# Allegro board PMOD2BNC.brd
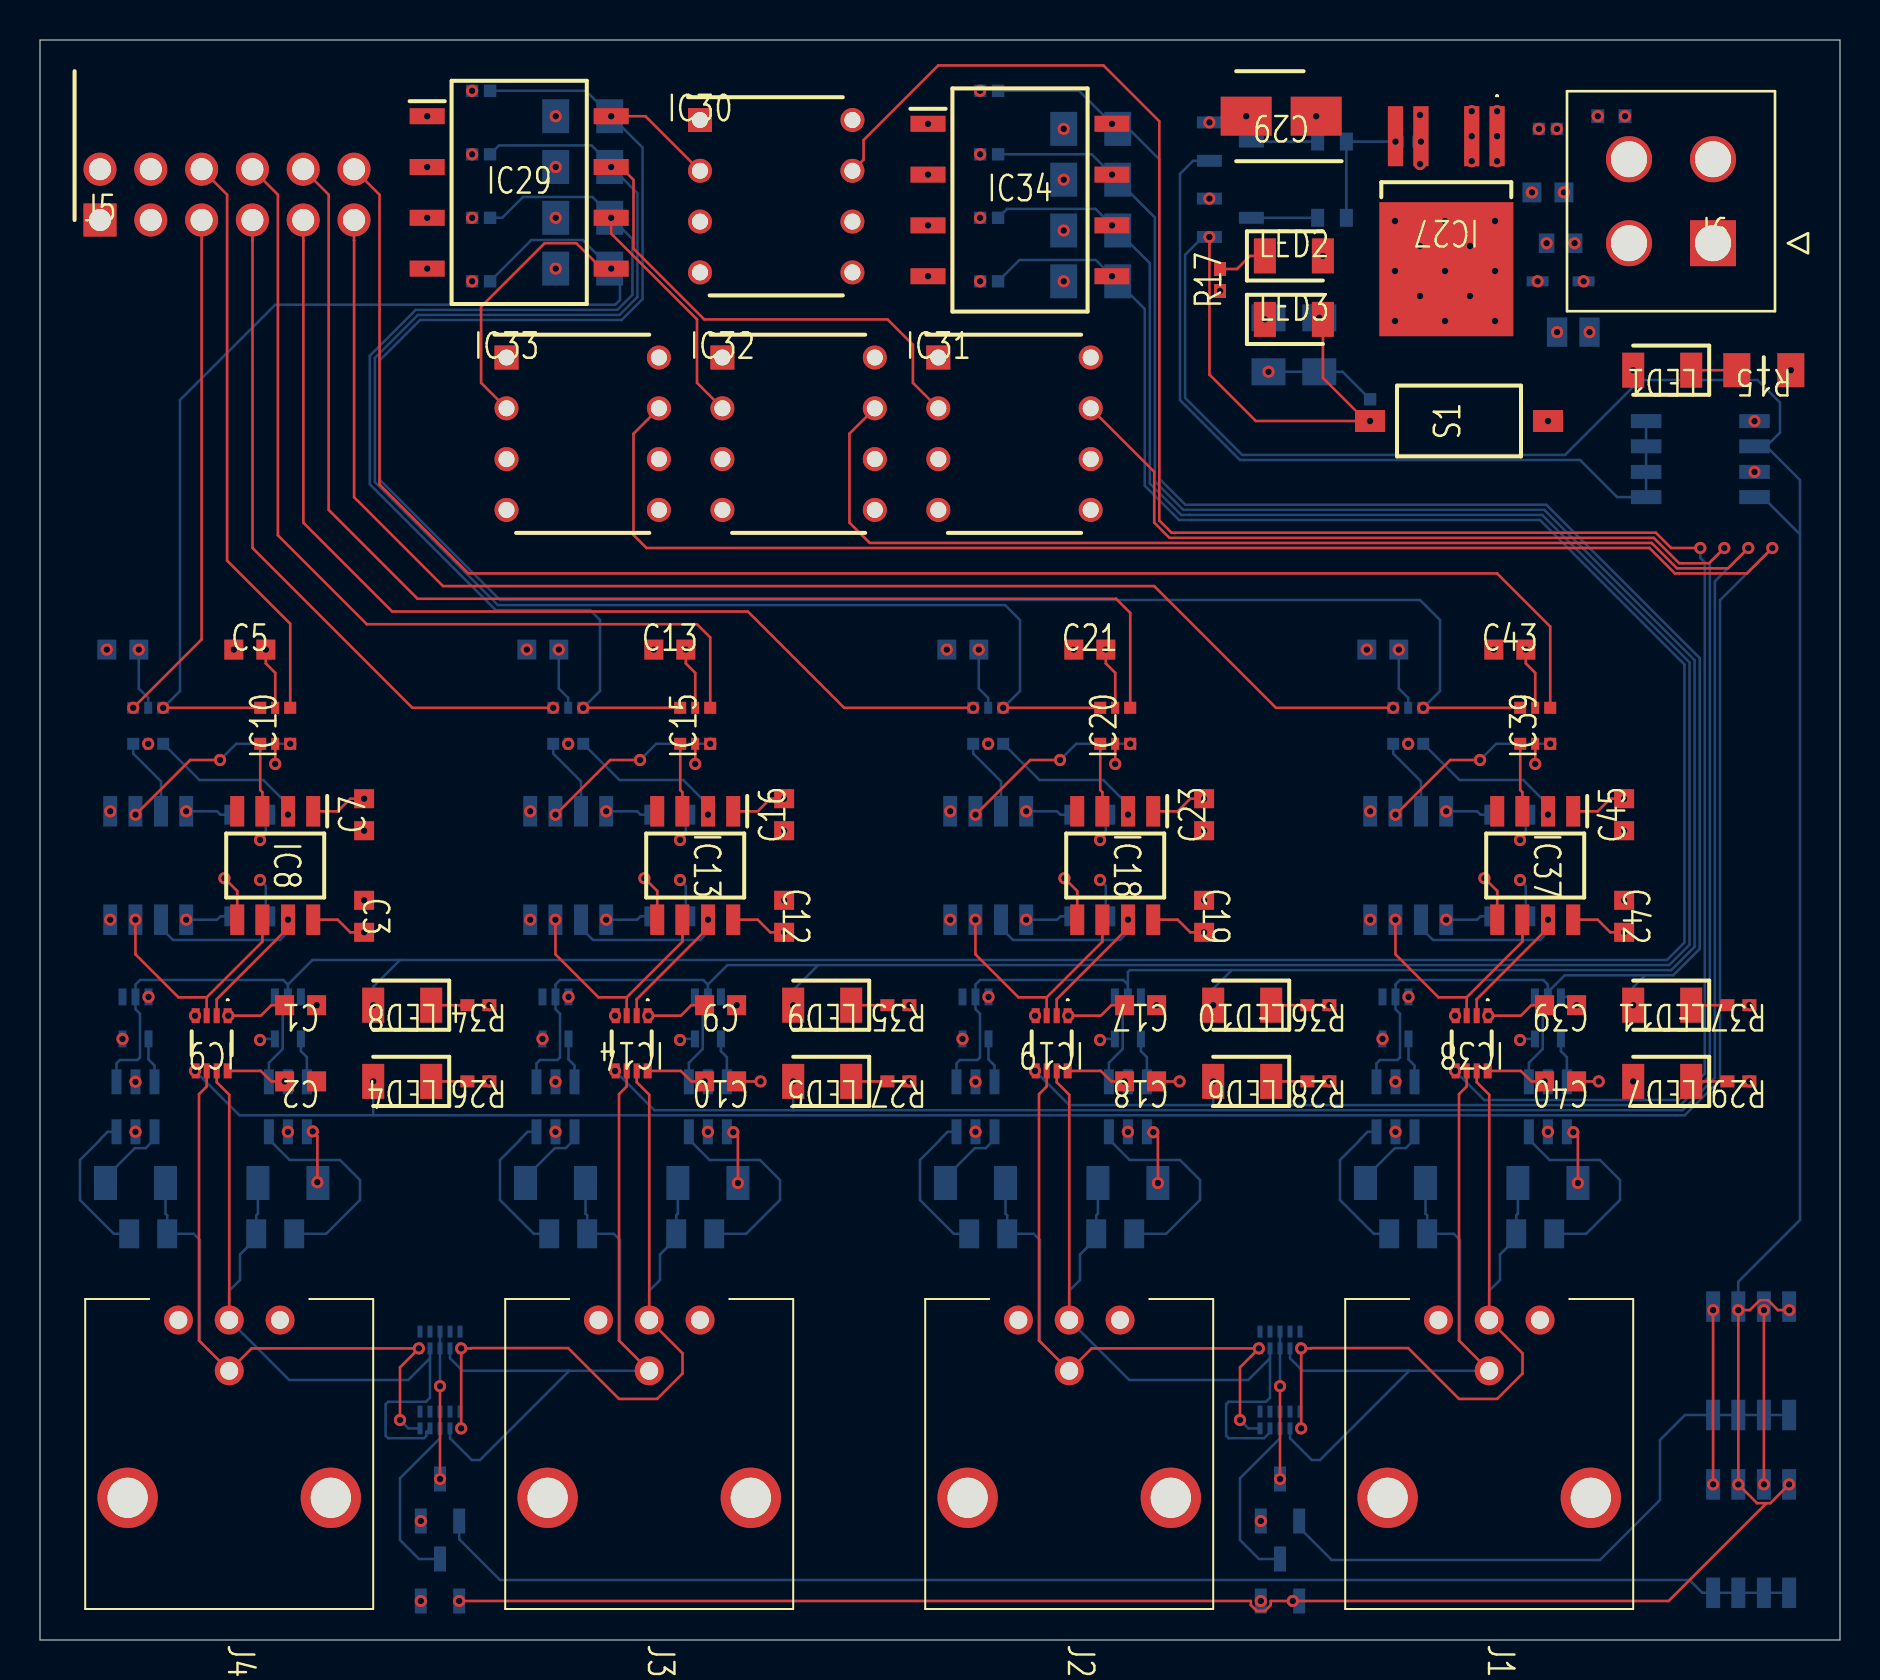
[diagram p0: board, top side]
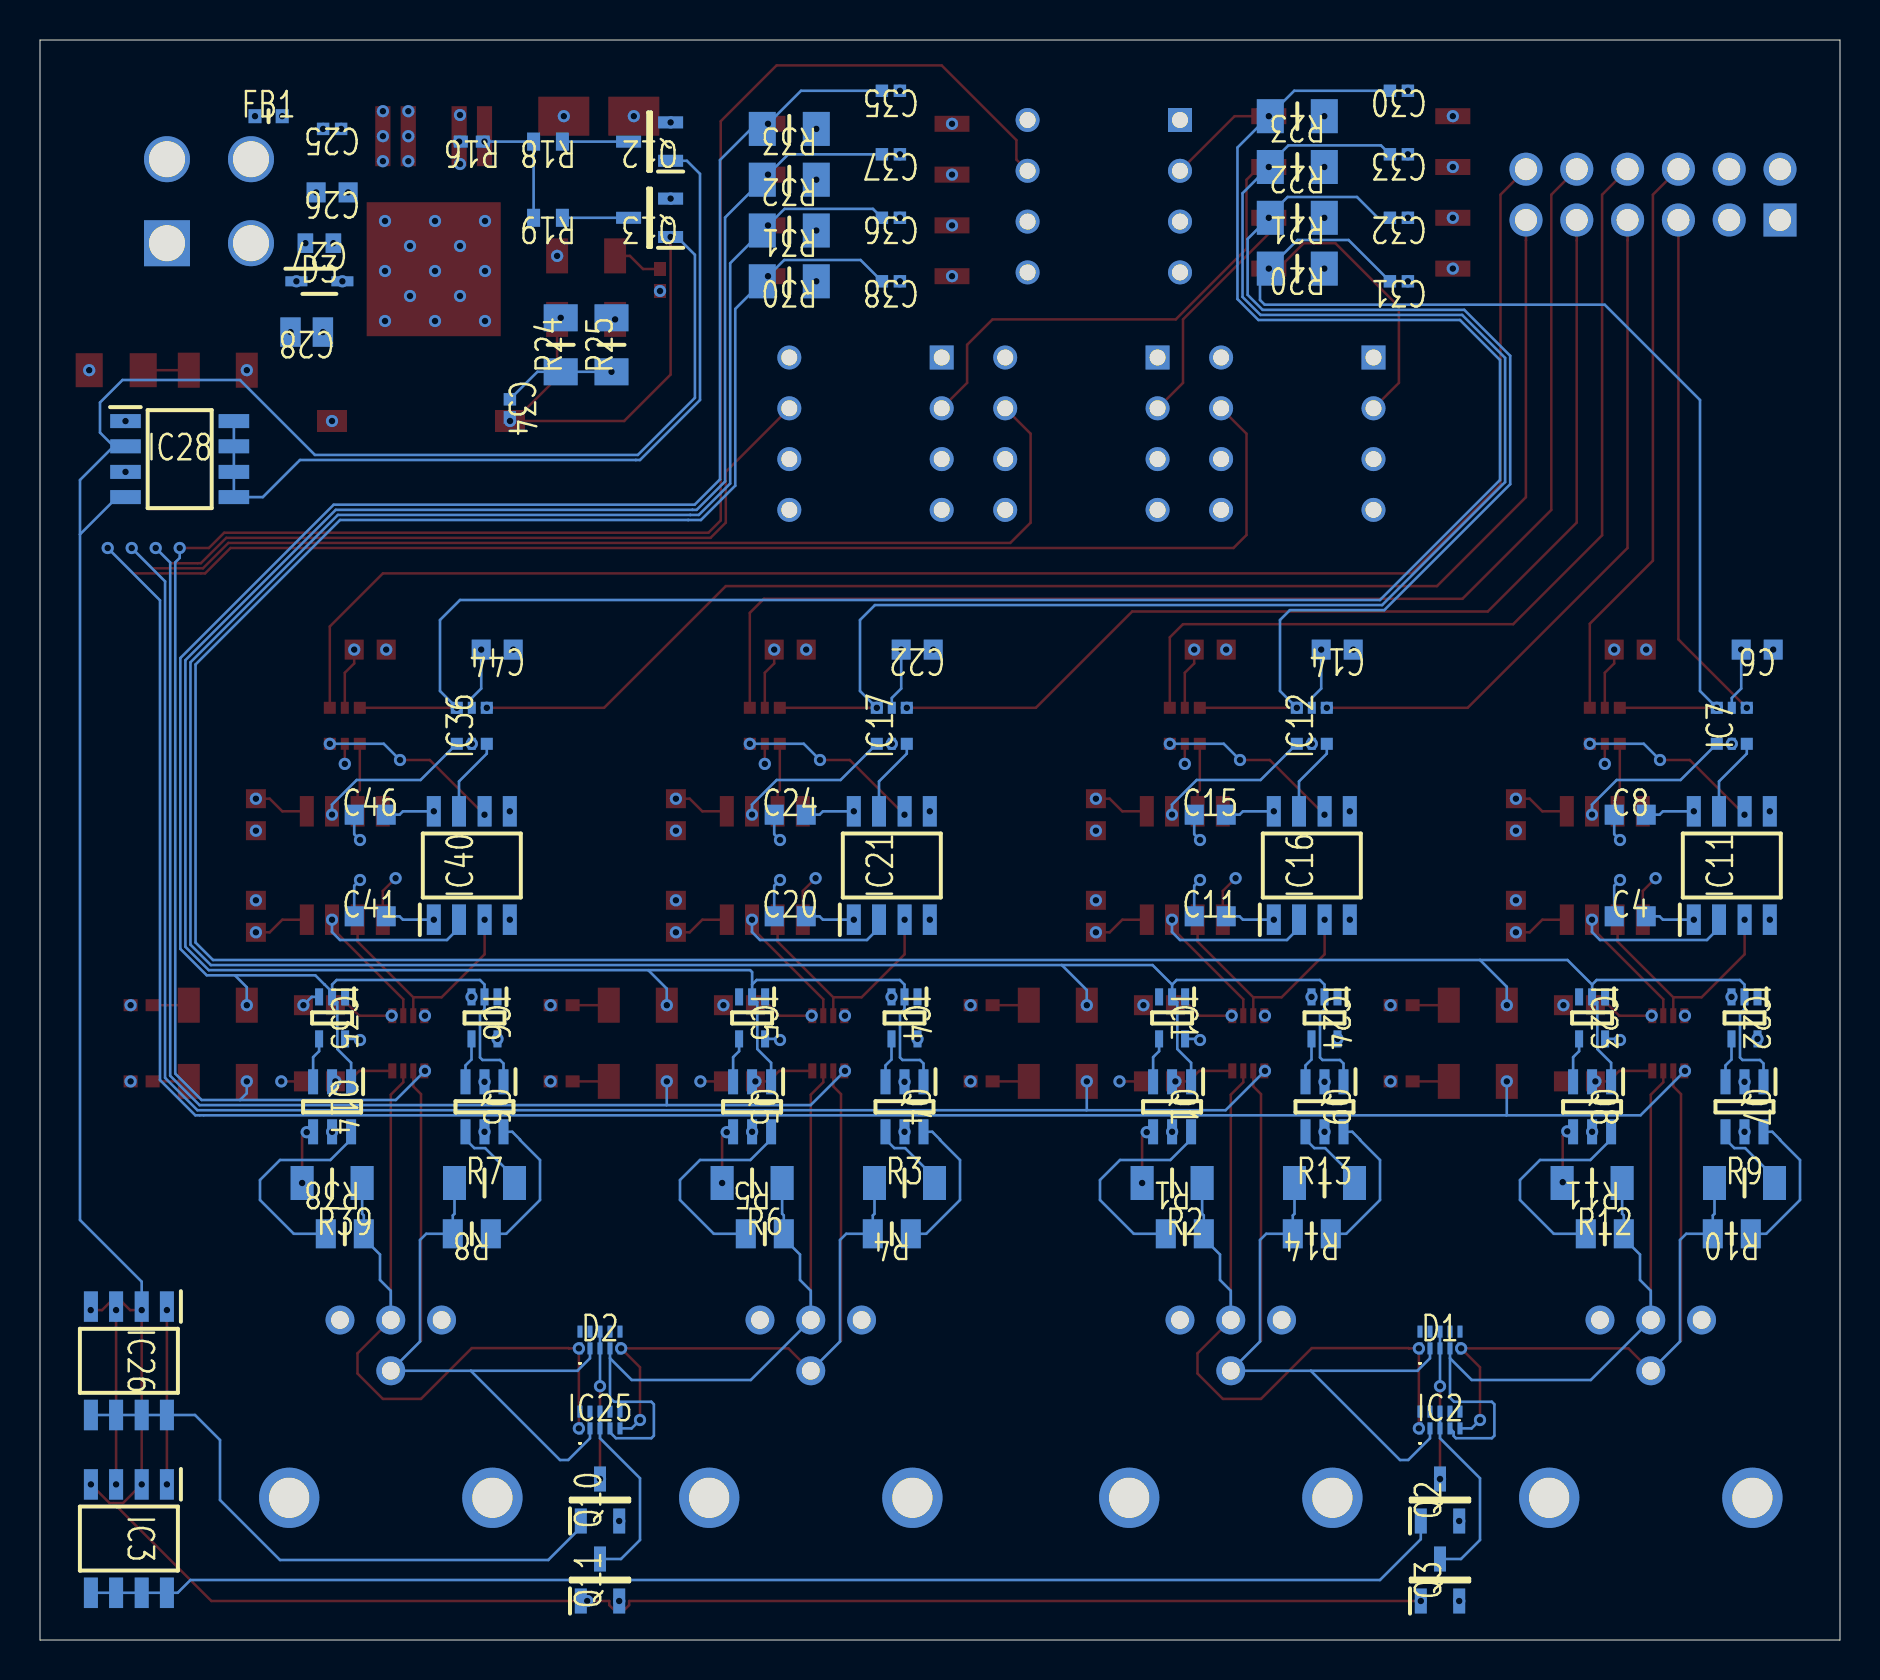
[diagram p1: board, bottom side, seen from below]

Outline 90 x 80 mm; copper layers: TOP, GND, VCC, BOTTOM. Coordinates in mm from the lower left corner of the outline.
Outline path: 0,80 90,80 90,0 0,0 0,80

## Design rules (mm)
constraint set DEFAULT: min track width 0.127

## Placement (name value [footprint] x y rotation side)
C1  C0603C104M3RACTM  [C0603]  13.03 31.74 180 top
C2  C0603C104M3RACTM  [C0603]  13.03 27.93 180 top
C3  C0603C104M3RACTM  [C0603]  16.2 36.19 270 top
C4  C0603C104M3RACTM  [C0603]  10.49 36.19 180 bottom
C5  C0603C104M3RACTM  [C0603]  10.49 49.52 0 top
C6  C0603C104M3RACTM  [C0603]  4.14 49.52 0 bottom
C7  C0603C104M3RACTM  [C0603]  16.2 41.27 90 top
C8  C0603C104M3RACTM  [C0603]  10.49 41.27 180 bottom
C9  C0603C104M3RACTM  [C0603]  34.03 31.74 180 top
C10  C0603C104M3RACTM  [C0603]  34.03 27.93 180 top
C11  C0603C104M3RACTM  [C0603]  31.49 36.19 180 bottom
C12  C0603C104M3RACTM  [C0603]  37.2 36.19 270 top
C13  C0603C104M3RACTM  [C0603]  31.49 49.52 0 top
C14  C0603C104M3RACTM  [C0603]  25.14 49.52 0 bottom
C15  C0603C104M3RACTM  [C0603]  31.49 41.27 180 bottom
C16  C0603C104M3RACTM  [C0603]  37.2 41.27 90 top
C17  C0603C104M3RACTM  [C0603]  55.03 31.74 180 top
C18  C0603C104M3RACTM  [C0603]  55.03 27.93 180 top
C19  C0603C104M3RACTM  [C0603]  58.2 36.19 270 top
C20  C0603C104M3RACTM  [C0603]  52.49 36.19 180 bottom
C21  C0603C104M3RACTM  [C0603]  52.49 49.52 0 top
C22  C0603C104M3RACTM  [C0603]  46.14 49.52 0 bottom
C23  C0603C104M3RACTM  [C0603]  58.2 41.27 90 top
C24  C0603C104M3RACTM  [C0603]  52.49 41.27 180 bottom
C25  C0402C103K3RAC7411  [C0402]  75.39 75.56 0 bottom
C26  C0603C104M3RACTM  [C0603]  75.39 72.38 0 bottom
C27  C0603C105K4RAC  [CAPC1608X90N]  76.03 69.84 0 bottom
C28  08053D334KAT2A  [CAPC2012X140N]  76.66 65.39 0 bottom
C29  MAL215375109E3  [CAPAE450X450N]  62.06 76.19 180 top
C30  C0402C103K3RAC7411  [C0402]  22.06 77.46 0 bottom
C31  C0402C103K3RAC7411  [C0402]  22.06 67.94 0 bottom
C32  C0402C103K3RAC7411  [C0402]  22.06 71.11 0 bottom
C33  C0402C103K3RAC7411  [C0402]  22.06 74.28 0 bottom
C34  C0402C103K3RAC7411  [C0402]  66.5 61.59 270 bottom
C35  C0402C103K3RAC7411  [C0402]  47.45 77.46 0 bottom
C36  C0402C103K3RAC7411  [C0402]  47.45 71.11 0 bottom
C37  C0402C103K3RAC7411  [C0402]  47.45 74.28 0 bottom
C38  C0402C103K3RAC7411  [C0402]  47.45 67.94 0 bottom
C39  C0603C104M3RACTM  [C0603]  76.03 31.74 180 top
C40  C0603C104M3RACTM  [C0603]  76.03 27.93 180 top
C41  C0603C104M3RACTM  [C0603]  73.49 36.19 180 bottom
C42  C0603C104M3RACTM  [C0603]  79.2 36.19 270 top
C43  C0603C104M3RACTM  [C0603]  73.49 49.52 0 top
C44  C0603C104M3RACTM  [C0603]  67.14 49.52 0 bottom
C45  C0603C104M3RACTM  [C0603]  79.2 41.27 90 top
C46  C0603C104M3RACTM  [C0603]  73.49 41.27 180 bottom
D1  PESD4USB3B_TBSX  [PESD4USB3BTBSX]  20 15 180 bottom
D2  PESD4USB3B_TBSX  [PESD4USB3BTBSX]  62 15 180 bottom
D3  PESD12VS1UA_115  [SOD2512X110N]  76.03 67.94 180 bottom
FB1  BLM18PG121SN1D  [BLM18EG121SH1D]  78.57 76.19 180 bottom
IC1  NLVHC1G14DFT1G  [SOT65P210X110-5N]  33.4 31.1 270 bottom
IC2  PESD4USB5B_TBRX  [PESD4USB5BTBRX]  20 11 180 bottom
IC3  FDS8958B  [SOIC127P600X175-8N]  85.56 5.07 270 bottom
IC4  NLVHC1G14DFT1G  [SOT65P210X110-5N]  46.77 31.1 270 bottom
IC5  NLVHC1G14DFT1G  [SOT65P210X110-5N]  54.4 31.1 270 bottom
IC6  NLVHC1G14DFT1G  [SOT65P210X110-5N]  67.78 31.1 270 bottom
IC7  74LVC1G3157GW_125  [74LVC1G3157GW125]  5.41 45.71 90 bottom
IC8  SI8620BC_B_IS  [SOIC127P600X175-8N]  11.76 38.73 270 top
IC9  74LVCH2T45DC_Q100H  [74LVCH2T45DCQ100H]  8.58 29.84 180 top
IC10  74LVC1G3157GW_125  [74LVC1G3157GW125]  11.76 45.71 90 top
IC11  SI8620BC_B_IS  [SOIC127P600X175-8N]  5.41 38.73 90 bottom
IC12  74LVC1G3157GW_125  [74LVC1G3157GW125]  26.41 45.71 90 bottom
IC13  SI8620BC_B_IS  [SOIC127P600X175-8N]  32.76 38.73 270 top
IC14  74LVCH2T45DC_Q100H  [74LVCH2T45DCQ100H]  29.59 29.84 180 top
IC15  74LVC1G3157GW_125  [74LVC1G3157GW125]  32.76 45.71 90 top
IC16  SI8620BC_B_IS  [SOIC127P600X175-8N]  26.41 38.73 90 bottom
IC17  74LVC1G3157GW_125  [74LVC1G3157GW125]  47.41 45.71 90 bottom
IC18  SI8620BC_B_IS  [SOIC127P600X175-8N]  53.76 38.73 270 top
IC19  74LVCH2T45DC_Q100H  [74LVCH2T45DCQ100H]  50.59 29.84 180 top
IC20  74LVC1G3157GW_125  [74LVC1G3157GW125]  53.76 45.71 90 top
IC21  SI8620BC_B_IS  [SOIC127P600X175-8N]  47.41 38.73 90 bottom
IC22  NLVHC1G14DFT1G  [SOT65P210X110-5N]  4.78 31.1 270 bottom
IC23  NLVHC1G14DFT1G  [SOT65P210X110-5N]  12.39 31.1 270 bottom
IC24  NLVHC1G14DFT1G  [SOT65P210X110-5N]  25.78 31.1 270 bottom
IC25  PESD4USB5B_TBRX  [PESD4USB5BTBRX]  62 11 180 bottom
IC26  FDS8958B  [SOIC127P600X175-8N]  85.56 13.96 270 bottom
IC27  -  [LD29150PTR]  70.31 69.84 180 top
IC28  FDS8958B  [SOIC127P600X175-8N]  83.02 59.05 180 bottom
IC29  DS04_254_2_04BK_SMT  [SOP254P990X430-8N]  23.96 72.38 0 top
IC30  TLP7920_D4_TP1_F  [DIP762W60P254L966H485Q8N]  33 76 0 top
IC31  TLP7920_D4_TP1_F  [DIP762W60P254L966H485Q8N]  44.91 64.12 0 top
IC32  TLP7920_D4_TP1_F  [DIP762W60P254L966H485Q8N]  34.12 64.12 0 top
IC33  TLP7920_D4_TP1_F  [DIP762W60P254L966H485Q8N]  23.33 64.12 0 top
IC34  DS04_254_2_04BK_SMT  [SOP254P990X430-8N]  49 72 0 top
IC35  NLVHC1G14DFT1G  [SOT65P210X110-5N]  75.39 31.1 270 bottom
IC36  74LVC1G3157GW_125  [74LVC1G3157GW125]  68.41 45.71 90 bottom
IC37  SI8620BC_B_IS  [SOIC127P600X175-8N]  74.76 38.73 270 top
IC38  74LVCH2T45DC_Q100H  [74LVCH2T45DCQ100H]  71.59 29.84 180 top
IC39  74LVC1G3157GW_125  [74LVC1G3157GW125]  74.76 45.71 90 top
IC40  SI8620BC_B_IS  [SOIC127P600X175-8N]  68.41 38.73 90 bottom
J1  031_6576  [0316576]  75 16 270 top
J2  031_6576  [0316576]  54 16 270 top
J3  031_6576  [0316576]  33 16 270 top
J4  031_6576  [0316576]  12 16 270 top
J5  71764_0114  [717640112]  3 71 0 top
J6  46207_1104  [46207-YY_2_04]  83.65 69.84 0 top
LED1  5988260107F  [LEDC3216X78N]  81.11 63.49 180 top
LED2  5988260107F  [LEDC3216X78N]  62.7 69.2 0 top
LED3  5988260107F  [LEDC3216X78N]  62.7 66.03 0 top
LED4  5988260107F  [LEDC3216X78N]  18.11 27.93 180 top
LED5  5988260107F  [LEDC3216X78N]  39.11 27.93 180 top
LED6  5988260107F  [LEDC3216X78N]  60.11 27.93 180 top
LED7  5988260107F  [LEDC3216X78N]  81.11 27.93 180 top
LED8  5988260107F  [LEDC3216X78N]  18.11 31.74 180 top
LED9  5988260107F  [LEDC3216X78N]  39.11 31.74 180 top
LED10  5988260107F  [LEDC3216X78N]  60.11 31.74 180 top
LED11  5988260107F  [LEDC3216X78N]  81.11 31.74 180 top
Q1  NTGD4167CT1G  [SOT95P275X110-6N]  33.4 26.66 270 bottom
Q2  NVR4501NT1G  [SOT96P237X111-3N]  20 7 90 bottom
Q3  NVR4501NT1G  [SOT96P237X111-3N]  20 3 90 bottom
Q4  NTGD4167CT1G  [SOT95P275X110-6N]  46.77 26.66 270 bottom
Q5  NTGD4167CT1G  [SOT95P275X110-6N]  54.4 26.66 270 bottom
Q6  NTGD4167CT1G  [SOT95P275X110-6N]  67.78 26.66 270 bottom
Q7  NTGD4167CT1G  [SOT95P275X110-6N]  4.78 26.66 270 bottom
Q8  NTGD4167CT1G  [SOT95P275X110-6N]  12.39 26.66 270 bottom
Q9  NTGD4167CT1G  [SOT95P275X110-6N]  25.78 26.66 270 bottom
Q10  NVR4501NT1G  [SOT96P237X111-3N]  62 7 90 bottom
Q11  NVR4501NT1G  [SOT96P237X111-3N]  62 3 90 bottom
Q12  NVR4501NT1G  [SOT96P237X111-3N]  59.52 74.92 0 bottom
Q13  NVR4501NT1G  [SOT96P237X111-3N]  59.52 71.11 0 bottom
Q14  NTGD4167CT1G  [SOT95P275X110-6N]  75.39 26.66 270 bottom
R1  ERA_8AEB1580V  [RESC3216X70N]  33.4 22.85 0 bottom
R2  RP73PF2A73R2BTDF  [RESC2012X65N]  32.76 20.31 180 bottom
R3  ERA_8AEB1580V  [RESC3216X70N]  46.77 22.85 180 bottom
R4  RP73PF2A73R2BTDF  [RESC2012X65N]  47.41 20.31 0 bottom
R5  ERA_8AEB1580V  [RESC3216X70N]  54.4 22.85 0 bottom
R6  RP73PF2A73R2BTDF  [RESC2012X65N]  53.76 20.31 180 bottom
R7  ERA_8AEB1580V  [RESC3216X70N]  67.78 22.85 180 bottom
R8  RP73PF2A73R2BTDF  [RESC2012X65N]  68.41 20.31 0 bottom
R9  ERA_8AEB1580V  [RESC3216X70N]  4.78 22.85 180 bottom
R10  RP73PF2A73R2BTDF  [RESC2012X65N]  5.41 20.31 0 bottom
R11  ERA_8AEB1580V  [RESC3216X70N]  12.39 22.85 0 bottom
R12  RP73PF2A73R2BTDF  [RESC2012X65N]  11.76 20.31 180 bottom
R13  ERA_8AEB1580V  [RESC3216X70N]  25.78 22.85 180 bottom
R14  RP73PF2A73R2BTDF  [RESC2012X65N]  26.41 20.31 0 bottom
R15  RNCP1206FTD10K0  [RESC3115X60N]  86.19 63.49 180 top
R16  TNPU04021K00BZEP00  [RESC1005X40N]  68.41 74.92 0 bottom
R17  TNPU04021K00BZEP00  [RESC1005X40N]  59 68 90 top
R18  ERA_3VEB5900V  [ERA3KV__0603_]  64.6 74.92 0 bottom
R19  ERA_3VEB3240V  [ERA3KV__0603_]  64.6 71.11 0 bottom
R20  RNCP1206FTD10K0  [RESC3115X60N]  27.13 68.57 0 bottom
R21  RNCP1206FTD10K0  [RESC3115X60N]  27.13 71.11 0 bottom
R22  RNCP1206FTD10K0  [RESC3115X60N]  27.13 73.65 0 bottom
R23  RNCP1206FTD10K0  [RESC3115X60N]  27.13 76.19 0 bottom
R24  RNCP1206FTD10K0  [RESC3115X60N]  63.97 64.76 90 bottom
R25  RNCP1206FTD10K0  [RESC3115X60N]  61.42 64.76 90 bottom
R26  TNPU04021K00BZEP00  [RESC1005X40N]  21.92 27.93 180 top
R27  TNPU04021K00BZEP00  [RESC1005X40N]  42.92 27.93 180 top
R28  TNPU04021K00BZEP00  [RESC1005X40N]  63.92 27.93 180 top
R29  TNPU04021K00BZEP00  [RESC1005X40N]  84.92 27.93 180 top
R30  RNCP1206FTD10K0  [RESC3115X60N]  52.53 67.94 0 bottom
R31  RNCP1206FTD10K0  [RESC3115X60N]  52.53 70.47 0 bottom
R32  RNCP1206FTD10K0  [RESC3115X60N]  52.53 73.02 0 bottom
R33  RNCP1206FTD10K0  [RESC3115X60N]  52.53 75.56 0 bottom
R34  TNPU04021K00BZEP00  [RESC1005X40N]  21.92 31.74 180 top
R35  TNPU04021K00BZEP00  [RESC1005X40N]  42.92 31.74 180 top
R36  TNPU04021K00BZEP00  [RESC1005X40N]  63.92 31.74 180 top
R37  TNPU04021K00BZEP00  [RESC1005X40N]  84.92 31.74 180 top
R38  ERA_8AEB1580V  [RESC3216X70N]  75.39 22.85 0 bottom
R39  RP73PF2A73R2BTDF  [RESC2012X65N]  74.76 20.31 180 bottom
S1  DS04_254_2_01BK_SMT_TR  [DS04254201BKSMTTR]  70.95 60.95 90 top

## Library data of the parts
C1-C24 C26 C39-C46 = C0603C104M3RACTM
C25 C30-C38 = C0402C103K3RAC7411
C27 = C0603C105K4RAC
C28 = 08053D334KAT2A
C29 = MAL215375109E3
D1 D2 = PESD4USB3B_TBSX
D3 = PESD12VS1UA_115
FB1 = BLM18PG121SN1D
IC1 IC4-IC6 IC22-IC24 IC35 = NLVHC1G14DFT1G
IC2 IC25 = PESD4USB5B_TBRX
IC3 IC26 IC28 = FDS8958B
IC7 IC10 IC12 IC15 IC17 IC20 IC36 IC39 = 74LVC1G3157GW_125
IC8 IC11 IC13 IC16 IC18 IC21 IC37 IC40 = SI8620BC_B_IS
IC9 IC14 IC19 IC38 = 74LVCH2T45DC_Q100H
IC27 = LD29150PTR
IC29 IC34 = DS04_254_2_04BK_SMT
IC30-IC33 = TLP7920_D4_TP1_F
J1-J4 = 031_6576
J5 = 71764_0114
J6 = 46207_1104
LED1-LED11 = 5988260107F
Q1 Q4-Q9 Q14 = NTGD4167CT1G
Q2 Q3 Q10-Q13 = NVR4501NT1G
R1 R3 R5 R7 R9 R11 R13 R38 = ERA_8AEB1580V
R2 R4 R6 R8 R10 R12 R14 R39 = RP73PF2A73R2BTDF
R15 R20-R25 R30-R33 = RNCP1206FTD10K0
R16 R17 R26-R29 R34-R37 = TNPU04021K00BZEP00
R18 = ERA_3VEB5900V
R19 = ERA_3VEB3240V
S1 = DS04_254_2_01BK_SMT_TR

## Footprints (pads in the part's own frame, mm; a bottom-side part is the same pattern mirrored in y, then rotated)
74LVC1G3157GW125
  rect 0.6x0.6 smd: 1(-0.9,0.75) 3(-0.9,-0.75) 4(0.9,-0.75) 6(0.9,0.75)
  rect 0.6x0.4 smd: 2(-0.9,0) 5(0.9,0)
74LVCH2T45DCQ100H
  rect 0.4x0.75 smd: 1(-0.8,-1.38) 4(0.8,-1.38) 5(0.8,1.38) 8(-0.8,1.38)
  rect 0.3x0.75 smd: 2(-0.25,-1.38) 3(0.25,-1.38) 6(0.25,1.38) 7(-0.25,1.38)
46207-YY_2_04
  rect 2.3x2.3 hole 1.8: 1(0,0)
  round 2.3 hole 1.8: 2(-4.2,0) 3(0,4.2) 4(-4.2,4.2)
0316576
  round 1.446 hole 0.89: 1(0,0) 2(0,-2.54) 3(0,-5.08) 4(2.54,-2.54)
  round 3.015 hole 2.01: MH1(8.89,-7.62) MH2(8.89,2.54)
717640112
  rect 1.65x1.65 hole 1.1: 1(0,0)
  round 1.65 hole 1.1: 2(0,2.54) 3(2.54,0) 4(2.54,2.54) 5(5.08,0) 6(5.08,2.54) 7(7.62,0) 8(7.62,2.54) 9(10.16,0) 10(10.16,2.54) 11(12.7,0) 12(12.7,2.54)
BLM18EG121SH1D
  rect 0.65x0.7 smd: 1(-0.68,0) 2(0.68,0)
C0402
  rect 0.62x0.62 smd: 1(-0.45,0) 2(0.45,0)
C0603
  rect 0.95x1 smd: 1(-0.8,0) 2(0.8,0)
CAPAE450X450N
  rect 2.55x1.95 smd: 1(-1.75,0) 2(1.75,0)
CAPC1608X90N
  rect 0.78x0.98 smd: 1(-0.7,0) 2(0.7,0)
CAPC2012X140N
  rect 1.02x1.47 smd: 1(-0.81,0) 2(0.81,0)
DIP762W60P254L966H485Q8N
  rect 1.2x1.2 hole 0.8: 1(0,0)
  round 1.2 hole 0.8: 2(0,-2.54) 3(0,-5.08) 4(0,-7.62) 5(7.62,-7.62) 6(7.62,-5.08) 7(7.62,-2.54) 8(7.62,0)
DS04254201BKSMTTR
  rect 1.1x1.5 smd: 1(0,-4.45) 2(0,4.45)
ERA3KV__0603_
  rect 0.65x0.9 smd: 1(-0.72,0) 2(0.72,0)
LD29150PTR
  rect 0.76x3 smd: 1(-2.54,-5.35) 2(-1.27,-5.35) 3(1.27,-5.35) 4(2.54,-5.35)
  rect 6.7x6.7 smd: 5(0,1.3)
LEDC3216X78N
  rect 1.1x1.75 smd: 1(-1.45,0) 2(1.45,0)
PESD4USB3BTBSX
  rect 0.25x0.6 smd: 1(-1,-0.42) 2(-0.5,-0.42) 3(0,-0.42) 4(0.5,-0.42) 5(1,-0.42) 6(1,0.42) 7(0.5,0.42) 8(0,0.42) 9(-0.5,0.42) 10(-1,0.42)
PESD4USB5BTBRX
  rect 0.25x0.6 smd: 1(-1,-0.42) 2(-0.5,-0.42) 3(0,-0.42) 4(0.5,-0.42) 5(1,-0.42) 6(1,0.42) 7(0.5,0.42) 8(0,0.42) 9(-0.5,0.42) 10(-1,0.42)
RESC1005X40N
  rect 0.7x0.6 smd: 1(-0.55,0) 2(0.55,0)
RESC2012X65N
  rect 1x1.45 smd: 1(-0.95,0) 2(0.95,0)
RESC3115X60N
  rect 1.35x1.7 smd: 1(-1.35,0) 2(1.35,0)
RESC3216X70N
  rect 1.15x1.7 smd: 1(-1.5,0) 2(1.5,0)
SOD2512X110N
  rect 1.1x0.5 smd: 1(-1.15,0) 2(1.15,0)
SOIC127P600X175-8N
  rect 1.525x0.7 smd: 1(-2.71,1.9) 2(-2.71,0.64) 3(-2.71,-0.64) 4(-2.71,-1.9) 5(2.71,-1.9) 6(2.71,-0.64) 7(2.71,0.64) 8(2.71,1.9)
SOP254P990X430-8N
  rect 1.75x0.8 smd: 1(-4.6,3.81) 2(-4.6,1.27) 3(-4.6,-1.27) 4(-4.6,-3.81) 5(4.6,-3.81) 6(4.6,-1.27) 7(4.6,1.27) 8(4.6,3.81)
SOT65P210X110-5N
  rect 0.85x0.4 smd: 1(-1.05,0.65) 2(-1.05,0) 3(-1.05,-0.65) 4(1.05,-0.65) 5(1.05,0.65)
SOT95P275X110-6N
  rect 1.25x0.5 smd: 1(-1.25,0.95) 2(-1.25,0) 3(-1.25,-0.95) 4(1.25,-0.95) 5(1.25,0) 6(1.25,0.95)
SOT96P237X111-3N
  rect 1.25x0.6 smd: 1(-1.05,0.96) 2(-1.05,-0.96) 3(1.05,0)

## Nets
3V3_FPGA: C5.2 C6.2 C7.2 C8.2 C13.2 C14.2 C15.2 C16.2 C21.2 C22.2 C23.2 C24.2 C43.2 C44.2 C45.2 C46.2 IC7.5 IC8.1 IC10.5 IC11.8(VDD2) IC12.5 IC13.1 IC15.5 IC16.8(VDD2) IC17.5 IC18.1 IC20.5 IC21.8(VDD2) IC29.1 IC29.2 IC29.3 IC29.4 IC30.1 IC31.1 IC32.1 IC33.1 IC36.5 IC37.1 IC39.5 IC40.8(VDD2) J5.3 J5.4
12V0: C25.2 C26.2 C27.2 C28.2 D3.1(K) FB1.2 IC3.3(S2) IC26.3(S2) IC27.1 IC27.2 IC28.3(S2) LED1.2 S1.1
GND_FPGA: C5.1 C6.1 C7.1 C8.1 C13.1 C14.1 C15.1 C16.1 C21.1 C22.1 C23.1 C24.1 C30.1 C31.1 C32.1 C33.1 C43.1 C44.1 C45.1 C46.1 IC7.2 IC8.4 IC10.2 IC11.5 IC12.2 IC13.4 IC15.2 IC16.5 IC17.2 IC18.4 IC20.2 IC21.5 IC30.3 IC30.4 IC31.3 IC31.4 IC32.3 IC32.4 IC33.3 IC33.4 IC36.2 IC37.4 IC39.2 IC40.5 J5.1 J5.2 R20.1 R21.1 R22.1 R23.1
GND_PWR: C1.1 C2.1 C3.1 C4.1 C9.1 C10.1 C11.1 C12.1 C17.1 C18.1 C19.1 C20.1 C25.1 C26.1 C27.1 C28.1 C29.2 C34.1 C35.1 C36.1 C37.1 C38.1 C39.1 C40.1 C41.1 C42.1 D3.2 IC1.3 IC3.1 IC4.3 IC5.3 IC6.3 IC8.5 IC9.4 IC11.4 IC13.5 IC14.4 IC16.4 IC18.5 IC19.4 IC21.4 IC22.3 IC23.3 IC24.3 IC26.1 IC27.5 IC28.1 IC30.5 IC30.6 IC31.5 IC31.6 IC32.5 IC32.6 IC33.5 IC33.6 IC35.3 IC37.5 IC38.4 IC40.4 J1.1 J1.3 J2.1 J2.3 J3.1 J3.3 J4.1 J4.3 J6.1 J6.2 Q1.5 Q2.2(S) Q3.2(S) Q4.5 Q5.5 Q6.5 Q7.5 Q8.5 Q9.5 Q10.2(S) Q11.2(S) Q12.2(S) Q13.2(S) Q14.5 R15.1 R17.1 R24.1 R25.1 R26.1 R27.1 R28.1 R29.1 R30.1 R31.1 R32.1 R33.1 R34.1 R35.1 R36.1 R37.1
VCC_PWR: C1.2 C2.2 C3.2 C4.2 C9.2 C10.2 C11.2 C12.2 C17.2 C18.2 C19.2 C20.2 C29.1(P) C39.2 C40.2 C41.2 C42.2 IC1.5 IC4.5 IC5.5 IC6.5 IC8.8(VDD2) IC9.1 IC9.8(VCC_B_) IC11.1 IC13.8(VDD2) IC14.1 IC14.8(VCC_B_) IC16.1 IC18.8(VDD2) IC19.1 IC19.8(VCC_B_) IC21.1 IC22.5 IC23.5 IC24.5 IC27.3(OUTPUT) IC30.8 IC31.8 IC32.8 IC33.8 IC34.1 IC34.2 IC34.3 IC34.4 IC35.5 IC37.8(VDD2) IC38.1 IC38.8(VCC_B_) IC40.1 LED2.2 Q1.2(S2) Q4.2(S2) Q5.2(S2) Q6.2(S2) Q7.2(S2) Q8.2(S2) Q9.2(S2) Q14.2(S2) R16.2
N03864_TRCV2: IC20.3 IC21.6
N03864_TRCV3: IC15.3 IC16.6
N03864_TRCV4: IC10.3 IC11.6
N03884_TRCV2: IC17.3 IC21.7
N03884_TRCV3: IC12.3 IC16.7
N03884_TRCV4: IC7.3 IC11.7
N03944_TRCV2: IC18.7 IC19.2 IC21.2
N03944_TRCV3: IC13.7 IC14.2 IC16.2
N03944_TRCV4: IC8.7 IC9.2 IC11.2
N03988_TRCV2: IC18.6 IC19.3 IC21.3
N03988_TRCV3: IC13.6 IC14.3 IC16.3
N03988_TRCV4: IC8.6 IC9.3 IC11.3
N04114_TR3: IC5.4(Y) Q5.3
N04114_TR4: IC4.4(Y) Q4.3
N04114_TR5: IC1.4(Y) Q1.3
N04114_TR7: IC23.4(Y) Q8.3
N04114_TR8: IC22.4(Y) Q7.3
N04142_TR3: Q5.4 R5.2
N04142_TR4: Q4.4 R3.2
N04142_TR5: Q1.4 R1.2
N04142_TR7: Q8.4 R11.2
N04142_TR8: Q7.4 R9.2
N04158_TRCV2: IC18.3 IC20.1
N04158_TRCV3: IC13.3 IC15.1
N04158_TRCV4: IC8.3 IC10.1
N04162_TR3: Q5.6 R6.1
N04162_TR4: Q4.6 R4.1
N04162_TR5: Q1.6 R2.1
N04162_TR7: Q8.6 R12.1
N04162_TR8: Q7.6 R10.1
N04170_TRCV2: IC17.1 IC18.2
N04170_TRCV3: IC12.1 IC13.2
N04170_TRCV4: IC7.1 IC8.2
N00459: D2.3 D2.8 Q10.3
N00484: IC25.3 IC25.8 Q11.3
N01414: IC39.3 IC40.6
N01460: IC36.3 IC40.7
N01560: IC37.7 IC38.2 IC40.2
N01576: IC37.6 IC38.3 IC40.3
N02564: IC35.4(Y) Q14.3
N02595: Q14.4 R38.2
N02615: Q14.6 R39.1
N02742: FB1.1 J6.3 J6.4
N02871: IC36.4(Z) J5.11
N02889: IC17.4(Z) J5.9
N02913: IC12.4(Z) J5.7
N02946: IC7.4(Z) J5.5
N02974: IC10.4(Z) J5.6
N03044: C30.2 IC29.8(NO_4) IC30.2 IC36.6 IC39.6 R23.2
N03056: C33.2 IC17.6 IC20.6 IC29.7 IC31.2 R22.2
N03071: C32.2 IC12.6 IC15.6 IC29.6 IC32.2 R21.2
N03083: C31.2 IC7.6 IC10.6 IC29.5 IC33.2 R20.2
N03095: IC30.7(VOUTP) IC38.5 LED7.2
N03107: IC19.5 IC31.7(VOUTP) LED6.2
N03119: IC14.5 IC32.7(VOUTP) LED5.2
N03131: IC9.5 IC33.7(VOUTP) LED4.2
N03320: IC37.3 IC39.1
N03332: IC36.1 IC37.2
N03351: D2.1 IC25.1 IC38.7 J1.2 R38.1 R39.2
N03369: D2.2 IC25.2 IC38.6 J1.4 R7.1 R8.2
N03381: D2.4 IC19.7 IC25.4 J2.2 R5.1 R6.2
N03410: D2.5 IC19.6 IC25.5 J2.4 R3.1 R4.2
N03422: D1.1 IC2.1 IC14.7 J3.2 R1.1 R2.2
N03434: D1.2 IC2.2 IC14.6 J3.4 R13.1 R14.2
N03446: D1.4 IC2.4 IC9.7 J4.2 R11.1 R12.2
N03458: D1.5 IC2.5 IC9.6 J4.4 R9.1 R10.2
N03470: C35.2 IC6.2 IC34.8(NO_4) IC35.2 LED11.2 Q6.1 Q14.1 R33.2
N03492: C37.2 IC4.2 IC5.2 IC34.7 LED10.2 Q4.1 Q5.1 R32.2
N03514: C36.2 IC1.2 IC24.2 IC34.6 LED9.2 Q1.1 Q9.1 R31.2
N03538: C38.2 IC22.2 IC23.2 IC34.5 LED8.2 Q7.1 Q8.1 R30.2
N03748: C34.2 IC3.2 IC3.4 IC26.2 IC26.4 IC28.2 IC28.4 LED3.2 Q3.1 Q11.1 Q13.1 R24.2 S1.2(NO)
N04132: IC6.4(Y) Q6.3
N04160: Q6.4 R7.2
N04180: Q6.6 R8.1
N04349: IC24.4(Y) Q9.3
N04377: Q9.4 R13.2
N04397: Q9.6 R14.1
N04832: IC27.4 R16.1 R18.2 R19.2
N05449: IC28.5 IC28.6 IC28.7 IC28.8 Q12.1
N05863: IC26.5 IC26.6 IC26.7 IC26.8 Q10.1
N05866: LED1.1(K) R15.2
N05972: LED2.1(K) R17.2
N06487: D1.3 D1.8 Q2.3
N06507: IC2.3 IC2.8 Q3.3
N06731: IC3.5 IC3.6 IC3.7 IC3.8 Q2.1
N07958: LED3.1(K) R25.2
N09508: LED8.1(K) R34.2
N09512: LED9.1(K) R35.2
N09516: LED10.1(K) R36.2
N09520: LED11.1(K) R37.2
N10946: LED4.1(K) R26.2
N10950: LED5.1(K) R27.2
N10954: LED6.1(K) R28.2
N10958: LED7.1(K) R29.2
N12525: IC39.4(Z) J5.12
N12551: IC20.4(Z) J5.10
N12586: IC15.4(Z) J5.8
N045052: Q12.3 R18.1
N045232: Q13.3 R19.1

Pads without a net: D1 6 7 9 10; D2 6 7 9 10; IC1 1; IC2 6 7 9 10; IC4 1; IC5 1; IC6 1; IC22 1; IC23 1; IC24 1; IC25 6 7 9 10; IC35 1; J1 MH1 MH2; J2 MH1 MH2; J3 MH1 MH2; J4 MH1 MH2

## Via types
v1: diameter 0.61, hole 0.33, TOP to BOTTOM, 284 vias

## Routing (per net, layer and track width the routed paths; a pad name or vN(x,y) marks a point on that pad's centre or on a via; arc(x,y) is an arc through that point)
3V3_FPGA: length 66.4
  TOP w0.127: IC10.5 11.76,48.36 11.29,48.83 v1(11.29,49.52) ; v1(58.2,42.06) 57.51,42.06 56.88,41.44 IC18.1 ; v1(79.2,42.06) 78.51,42.06 77.88,41.44 IC37.1 ; v1(37.2,42.06) 36.51,42.06 35.88,41.44 IC13.1 ; IC8.1 14.88,41.44 15.51,42.06 v1(16.2,42.06) ; IC15.5 32.76,48.36 32.29,48.83 v1(32.29,49.52) ; v1(74.29,49.52) 74.29,48.83 74.76,48.36 IC39.5 ; IC20.5 53.76,48.36 53.29,48.83 v1(53.29,49.52)
  VCC w0.127: IC31.1 45.7,64.12 ; IC31.1 44.13,64.12 ; IC31.1 44.91,64.91 ; IC31.1 44.91,63.34 ; 32.22,76 IC30.1 ; IC30.1 33,75.22 ; IC30.1 33.78,76 ; IC30.1 33,76.78 ; 33.34,64.12 IC32.1 ; IC32.1 34.9,64.12 ; IC32.1 34.12,63.34 ; IC32.1 34.12,64.91 ; 4.53,73.54 J5.4 ; J5.4 5.54,74.55 ; J5.4 6.55,73.54 ; J5.4 5.54,72.53 ; 22.55,64.12 IC33.1 ; IC33.1 24.11,64.12 ; IC33.1 23.33,63.34 ; IC33.1 23.33,64.91 ; 4.53,71 J5.3 ; J5.3 5.54,70 ; J5.3 6.55,71 ; J5.3 5.54,72
  BOTTOM w0.127: v1(49.31,41.44) 50.85,41.44 51.02,41.27 C24.2 ; C46.2 72.02,41.27 71.85,41.44 v1(70.31,41.44) ; v1(4.94,49.52) 4.94,47.57 5.41,47.1 IC7.5 ; C15.2 30.02,41.27 29.85,41.44 v1(28.31,41.44) ; IC36.5 68.41,47.1 67.94,47.57 v1(67.94,49.52) ; v1(46.94,49.52) 46.94,47.57 47.41,47.1 IC17.5 ; v1(25.94,49.52) 25.94,47.57 26.41,47.1 IC12.5 ; C8.2 9.02,41.27 8.85,41.44 v1(7.31,41.44)
  vias: v1(19.36,76.19) v1(19.36,73.65) v1(19.36,71.11) v1(19.36,68.57)
12V0: length 8.7
  TOP w0.127: v1(86.19,7.78) v1(86.19,16.49)
  vias: v1(71.59,76.44) v1(71.59,75.19) v1(71.59,73.94) v1(72.86,76.44) v1(72.86,75.19) v1(72.86,73.94) v1(75.4,60.95) v1(75.84,75.56) v1(76.19,72.38) v1(76.73,69.84) v1(77.18,67.94) v1(77.47,65.39) v1(77.89,76.19) v1(79.66,63.49) v1(85.72,58.41)
GND_FPGA: length 42.6
  TOP w0.127: IC15.2 v1(32.76,43.8) ; IC10.2 v1(11.76,43.8) ; IC20.2 v1(53.76,43.8) ; IC39.2 v1(74.76,43.8)
  GND w0.127: 32.22,68.38 IC30.4 ; IC30.4 33,67.6 ; IC30.4 33.78,68.38 ; IC30.4 33,69.16 ; 33,70.14 IC30.3 ; IC30.3 32.22,70.92 ; IC30.3 33,71.7 ; IC30.3 33.78,70.92 ; J5.1 3,72 ; J5.1 4,71 ; J5.1 2,71 ; J5.1 3,70 ; J5.2 3,74.55 ; J5.2 3,72.53 ; J5.2 2,73.54 ; J5.2 4,73.54 ; 44.13,59.05 IC31.3 ; IC31.3 45.7,59.05 ; IC31.3 44.91,59.83 ; IC31.3 44.91,58.27 ; IC32.3 34.9,59.05 ; IC32.3 33.34,59.05 ; IC32.3 34.12,58.27 ; IC32.3 34.12,59.83 ; IC33.4 24.11,56.5 ; IC33.4 23.33,57.28 ; IC33.4 22.55,56.5 ; IC33.4 23.33,55.73 ; IC33.3 23.33,59.83 ; IC33.3 23.33,58.27 ; IC33.3 24.11,59.05 ; IC33.3 22.55,59.05 ; 33.34,56.5 IC32.4 ; IC32.4 34.12,55.73 ; IC32.4 34.9,56.5 ; IC32.4 34.12,57.28 ; 44.91,55.73 IC31.4 ; IC31.4 45.7,56.5 ; IC31.4 44.13,56.5 ; IC31.4 44.91,57.28
  BOTTOM w0.127: C24.1 53.29,40.29 v1(53,40) ; v1(74,40) 74.29,40.29 C46.1 ; v1(11,40) 11.29,40.29 C8.1 ; v1(32,40) 32.29,40.29 C15.1
  vias: v1(3.34,49.52) v1(3.51,41.44) v1(5.41,44.81) v1(9.69,49.52) v1(16.2,40.47) v1(21.61,77.46) v1(21.61,74.28) v1(21.61,71.11) v1(21.61,67.94) v1(24.34,49.52) v1(24.51,41.44) v1(25.78,76.19) v1(25.78,73.65) v1(25.78,71.11) v1(25.78,68.57) v1(26.41,44.81) v1(30.69,49.52) v1(37.2,40.47) v1(45.34,49.52) v1(45.51,41.44) v1(47.41,44.81) v1(51.69,49.52) v1(58.2,40.47) v1(66.34,49.52) v1(66.51,41.44) v1(68.41,44.81) v1(72.69,49.52) v1(79.2,40.47)
GND_PWR: length 100.4
  TOP w0.127: IC13.5 30.86,37.45 v1(30.22,38.09) ; v1(72.22,38.09) 72.86,37.45 IC37.5 ; C10.1 v1(36.02,27.93) ; v1(51.22,38.09) 51.86,37.45 IC18.5 ; v1(9.22,38.09) 9.86,37.45 IC8.5 ; C18.1 v1(56.98,27.93) ; v1(83.66,7.78) v1(83.66,16.49) ; C40.1 v1(77.94,27.93)
  GND w0.127: J6.1 84.98,69.84 ; J6.1 82.32,69.84 ; J6.1 83.65,71.17 ; J6.1 83.65,68.51 ; 6.02,16 J4.3 ; J4.3 6.92,16.9 ; J4.3 6.92,15.1 ; J4.3 7.82,16 ; 41.74,58.27 IC32.6 ; IC32.6 41.74,59.83 ; IC32.6 40.96,59.05 ; IC32.6 42.52,59.05 ; 48.92,15.1 J2.3 ; J2.3 48.02,16 ; J2.3 49.82,16 ; J2.3 48.92,16.9 ; IC30.6 41.4,70.92 ; IC30.6 39.84,70.92 ; IC30.6 40.62,71.7 ; IC30.6 40.62,70.14 ; IC33.5 30.95,57.28 ; IC33.5 30.16,56.5 ; IC33.5 30.95,55.73 ; IC33.5 31.73,56.5 ; J2.1 54,16.9 ; J2.1 54,15.1 ; J2.1 53.1,16 ; J2.1 54.9,16 ; 11.1,16 J4.1 ; J4.1 12,15.1 ; J4.1 12,16.9 ; J4.1 12.9,16 ; IC33.6 31.73,59.05 ; IC33.6 30.95,58.27 ; IC33.6 30.16,59.05 ; IC33.6 30.95,59.83 ; 69.92,15.1 J1.3 ; J1.3 69.02,16 ; J1.3 70.82,16 ; J1.3 69.92,16.9 ; IC31.5 53.31,56.5 ; IC31.5 52.53,55.73 ; IC31.5 51.76,56.5 ; IC31.5 52.53,57.28 ; IC32.5 41.74,57.28 ; IC32.5 41.74,55.73 ; IC32.5 42.52,56.5 ; IC32.5 40.96,56.5 ; J6.2 79.45,71.17 ; J6.2 80.78,69.84 ; J6.2 79.45,68.51 ; J6.2 78.12,69.84 ; J3.1 33.9,16 ; J3.1 33,16.9 ; J3.1 32.1,16 ; J3.1 33,15.1 ; J3.3 27.92,16.9 ; J3.3 27.92,15.1 ; J3.3 27.02,16 ; J3.3 28.82,16 ; 40.62,67.6 IC30.5 ; IC30.5 39.84,68.38 ; IC30.5 41.4,68.38 ; IC30.5 40.62,69.16 ; J1.1 75,16.9 ; J1.1 74.1,16 ; J1.1 75,15.1 ; J1.1 75.9,16 ; 52.53,58.27 IC31.6 ; IC31.6 51.76,59.05 ; IC31.6 52.53,59.83 ; IC31.6 53.31,59.05
  BOTTOM w0.127: C34.1 65.13,63.41 R24.1 v1(61.42,63.41) ; C41.1 74.29,37.71 v1(74,38) ; v1(32,38) 32.29,37.71 C11.1 ; v1(53,38) 53.29,37.71 C20.1 ; v1(11,38) 11.29,37.71 C4.1 ; v1(76.83,31.74) 76.41,32.16 76.05,32.16
  vias: v1(3.51,36.02) v1(4.78,25.41) v1(5.42,32.16) v1(7.75,31.22) v1(12.39,25.41) v1(13.83,31.74) v1(16.2,36.98) v1(19.04,5.95) v1(19.04,1.95) v1(22.47,31.74) v1(22.47,27.93) v1(24.51,36.02) v1(25.78,25.41) v1(26.42,32.16) v1(28.75,31.22) v1(33.4,25.41) v1(34.83,31.74) v1(37.2,36.98) v1(43.47,31.74) v1(43.47,27.93) v1(45.51,36.02) v1(46.77,25.41) v1(47.01,77.46) v1(47.01,74.28) v1(47.01,71.11) v1(47.01,67.94) v1(47.42,32.16) v1(49.75,31.22) v1(51.19,75.56) v1(51.19,73.02) v1(51.19,70.47) v1(51.19,67.94) v1(54.4,25.41) v1(55.83,31.74) v1(58.2,36.98) v1(58.47,75.88) v1(58.47,72.07) v1(59,67.45) v1(60.31,76.19) v1(61.04,5.95) v1(61.04,1.95) v1(64.47,31.74) v1(64.47,27.93) v1(66.51,36.02) v1(67.75,70.95) v1(67.75,68.45) v1(67.75,65.95) v1(67.78,25.41) v1(68.42,32.16) v1(69,69.7) v1(69,67.2) v1(70.25,70.95) v1(70.25,68.45) v1(70.25,65.95) v1(70.75,31.22) v1(71.5,69.7) v1(71.5,67.2) v1(72.75,70.95) v1(72.75,68.45) v1(72.75,65.95) v1(74.59,72.38) v1(74.94,75.56) v1(74.88,67.94) v1(75.33,69.84) v1(75.39,25.41) v1(75.86,65.39) v1(79.2,36.98) v1(85.47,31.74) v1(85.47,27.93) v1(85.72,60.95) v1(87.54,63.49)
VCC_PWR: length 61.1
  TOP w0.127: v1(37.2,35.38) 36.51,35.38 35.88,36.02 IC13.8 ; C39.2 74.56,31.74 74.04,31.22 v1(72.42,31.22) IC38.1 ; IC9.8 11.04,28.45 11.56,27.93 v1(12.23,27.93) ; IC19.1 v1(51.42,31.22) 53.04,31.22 53.56,31.74 C17.2 ; v1(54.23,27.93) 53.56,27.93 53.04,28.45 IC19.8 ; IC38.8 74.04,28.45 74.56,27.93 v1(75.23,27.93) ; IC9.1 v1(9.42,31.22) 11.04,31.22 11.56,31.74 C1.2 ; v1(33.23,27.93) 32.56,27.93 32.04,28.45 IC14.8 ; IC14.1 v1(30.42,31.22) 32.04,31.22 32.56,31.74 C9.2 ; IC18.8 56.88,36.02 57.51,35.38 v1(58.2,35.38) ; IC37.8 77.88,36.02 78.51,35.38 v1(79.2,35.38) ; v1(16.2,35.38) 15.51,35.38 14.88,36.02 IC8.8
  VCC w0.127: IC33.8 31.73,64.12 ; IC33.8 30.16,64.12 ; IC33.8 30.95,64.91 ; IC33.8 30.95,63.34 ; IC32.8 41.74,64.91 ; IC32.8 41.74,63.34 ; IC32.8 40.96,64.12 ; IC32.8 42.52,64.12 ; IC30.8 41.4,76 ; IC30.8 40.62,75.22 ; IC30.8 39.84,76 ; IC30.8 40.62,76.78 ; 52.53,63.34 IC31.8 ; IC31.8 52.53,64.91 ; IC31.8 51.76,64.12 ; IC31.8 53.31,64.12
  BOTTOM w0.127: IC35.5 74.06,30.05 v1(74,30) ; v1(11,30) 11.06,30.05 IC23.5 ; v1(53,30) 53.05,30.05 53.74,30.05 ; v1(49.31,36.02) 50.85,36.02 51.02,36.19 C20.2 ; v1(28.31,36.02) 29.85,36.02 30.02,36.19 C11.2 ; C4.2 9.02,36.19 8.85,36.02 v1(7.31,36.02) ; C41.2 72.02,36.19 71.85,36.02 v1(70.31,36.02) ; v1(32,30) 32.05,30.05 32.74,30.05
  vias: v1(4.12,30.05) v1(4.78,27.91) v1(25.12,30.05) v1(25.78,27.91) v1(44.4,75.81) v1(44.4,73.27) v1(44.4,70.73) v1(44.4,68.19) v1(46.12,30.05) v1(46.77,27.91) v1(63.81,76.19) v1(64.14,69.2) v1(67.12,30.05) v1(67.78,27.91) v1(69,76.25) v1(69.05,74.92) v1(69,73.8)
N03864_TRCV2: length 9.2
  TOP w0.127: v1(51,44) 49.51,44 v1(46.77,41.27)
  BOTTOM w0.127: v1(51,44) 51.81,44.81 v1(54.51,44.81)
N03864_TRCV3: length 9.2
  TOP w0.127: v1(30,44) 28.51,44 v1(25.78,41.27)
  BOTTOM w0.127: v1(33.51,44.81) 30.81,44.81 v1(30,44)
N03864_TRCV4: length 9.2
  TOP w0.127: v1(4.78,41.27) 7.51,44 v1(9,44)
  BOTTOM w0.127: v1(12.51,44.81) 9.81,44.81 v1(9,44)
N03884_TRCV2: length 4
  BOTTOM w0.127: IC17.3 46.66,44.32 48.05,42.93 IC21.7
N03884_TRCV3: length 4
  BOTTOM w0.127: IC12.3 25.66,44.32 27.05,42.93 IC16.7
N03884_TRCV4: length 4
  BOTTOM w0.127: IC7.3 4.66,44.32 6.05,42.93 IC11.7
N03944_TRCV2: length 14.1
  TOP w0.127: IC19.2 50.84,32.04 54.4,35.6 v1(54.4,36.02)
  BOTTOM w0.127: v1(54.4,36.02) 54.4,35.4 54,35 48.65,35 48.05,35.6 IC21.2
N03944_TRCV3: length 14.1
  TOP w0.127: IC14.2 29.84,32.04 33.4,35.6 v1(33.4,36.02)
  BOTTOM w0.127: v1(33.4,36.02) 33.4,35.4 33,35 27.65,35 27.05,35.6 IC16.2
N03944_TRCV4: length 14.1
  TOP w0.127: v1(12.4,36.02) 12.4,35.6 8.83,32.04 IC9.2
  BOTTOM w0.127: IC11.2 6.05,35.6 6.65,35 12,35 12.4,35.4 v1(12.4,36.02)
N03988_TRCV2: length 12.1
  TOP w0.127: 50.34,32.13 48.92,32.13 46.77,34.28 v1(46.77,36.02) ; 50.34,32.13 53.12,34.92 IC18.6 ; 50.34,32.13 IC19.3
N03988_TRCV3: length 12.1
  TOP w0.127: IC13.6 32.12,34.92 29.34,32.13 ; 29.34,32.13 IC14.3 ; 29.34,32.13 27.92,32.13 25.77,34.28 v1(25.77,36.02)
N03988_TRCV4: length 12.1
  TOP w0.127: 8.33,32.13 11.12,34.92 IC8.6 ; 8.33,32.13 6.92,32.13 4.77,34.28 v1(4.77,36.02) ; 8.33,32.13 IC9.3
N04114_TR3: length 2.3
  BOTTOM w0.127: 55.34,27.91 55.34,29.14 55.05,29.44 IC5.4
N04114_TR4: length 2.3
  BOTTOM w0.127: Q4.3 47.73,28.73 47.42,29.03 IC4.4
N04114_TR5: length 2.3
  BOTTOM w0.127: IC1.4 34.05,29.44 34.34,29.14 34.34,27.91
N04114_TR7: length 2.3
  BOTTOM w0.127: IC23.4 13.05,29.44 13.34,29.14 Q8.3
N04114_TR8: length 2.3
  BOTTOM w0.127: 5.72,27.91 5.72,28.73 5.42,29.03 5.42,30.05
N04142_TR3: length 3
  TOP w0.127: v1(55.66,25.39) 55.9,25.16 v1(55.9,22.85)
  BOTTOM w0.127: 55.34,25.41 55.37,25.39 v1(55.66,25.39)
N04142_TR4: length 3.9
  BOTTOM w0.127: Q4.4 47.73,25.03 47.28,24.59 46.74,24.59 45.27,23.12 R3.2
N04142_TR5: length 3
  TOP w0.127: v1(34.9,22.85) 34.9,25.16 v1(34.66,25.39)
  BOTTOM w0.127: 34.34,25.41 34.37,25.39 v1(34.66,25.39)
N04142_TR7: length 3
  TOP w0.127: v1(13.87,22.89) 13.87,25.2 v1(13.64,25.43)
  BOTTOM w0.127: 13.32,25.45 13.34,25.43 v1(13.64,25.43)
N04142_TR8: length 3.9
  BOTTOM w0.127: 5.72,25.41 5.72,25.03 5.28,24.59 4.74,24.59 3.28,23.12 R9.2
N04158_TRCV2: length 3.4
  TOP w0.127: IC20.1 53.01,42.5 53.12,42.39 IC18.3
N04158_TRCV3: length 3.4
  TOP w0.127: IC15.1 32.01,42.5 32.12,42.39 IC13.3
N04158_TRCV4: length 3.4
  TOP w0.127: IC8.3 11.12,42.39 11.01,42.5 IC10.1
N04162_TR3: length 10.8
  BOTTOM w0.127: R6.1 56.31,20.31 58,22 58,23 57,24 54.48,24 53.45,25.03 Q5.6
N04162_TR4: length 7.6
  BOTTOM w0.127: Q4.6 45.38,25.41 45,25.03 45,25 44,24 44,22 45.69,20.31 R4.1
N04162_TR5: length 10.8
  BOTTOM w0.127: R2.1 35.31,20.31 37,22 37,23 36,24 33.48,24 32.45,25.03 Q1.6
N04162_TR7: length 10.8
  BOTTOM w0.127: R12.1 14.31,20.31 16,22 16,23 15,24 12.48,24 11.44,25.03 Q8.6
N04162_TR8: length 7.6
  BOTTOM w0.127: Q7.6 3.38,25.41 3,25.03 3,25 2,24 2,22 3.69,20.31 R10.1
N04170_TRCV2: length 8.2
  TOP w0.127: IC18.2 v1(54.4,41.27)
  BOTTOM w0.127: v1(54.4,41.27) 54.4,41.77 53.17,43 49.97,43 IC17.1
N04170_TRCV3: length 8.2
  TOP w0.127: IC13.2 v1(33.4,41.27)
  BOTTOM w0.127: v1(33.4,41.27) 33.4,41.77 32.17,43 28.97,43 IC12.1
N04170_TRCV4: length 8.2
  TOP w0.127: IC8.2 v1(12.4,41.27)
  BOTTOM w0.127: v1(12.4,41.27) 12.4,41.77 11.17,43 7.97,43 IC7.1
N00459: length 7.4
  TOP w0.127: v1(62,8.05) v1(62,12.69)
  BOTTOM w0.127: v1(62,12.69) D2.3 D2.8
N00484: length 9.6
  BOTTOM w0.127: IC25.8 IC25.3 62,10.09 60,8.09 60,5 60.95,4.05 Q11.3
N01414: length 9.2
  TOP w0.127: v1(72,44) 70.51,44 v1(67.78,41.27)
  BOTTOM w0.127: v1(75.51,44.81) 72.81,44.81 v1(72,44)
N01460: length 4
  BOTTOM w0.127: IC40.7 69.05,42.93 67.66,44.32 IC36.3
N01560: length 14.1
  TOP w0.127: IC38.2 71.84,32.04 75.4,35.6 v1(75.4,36.02)
  BOTTOM w0.127: IC40.2 69.05,35.6 69.65,35 75,35 75.4,35.4 v1(75.4,36.02)
N01576: length 12.1
  TOP w0.127: IC38.3 71.34,32.13 ; 71.34,32.13 69.92,32.13 67.77,34.28 v1(67.77,36.02) ; 71.34,32.13 74.12,34.92 IC37.6
N02564: length 2.3
  BOTTOM w0.127: IC35.4 76.05,29.44 76.34,29.14 Q14.3
N02595: length 3
  TOP w0.127: v1(76.66,25.39) 76.89,25.16 v1(76.89,22.85)
  BOTTOM w0.127: v1(76.66,25.39) 76.36,25.39 Q14.4
N02615: length 10.8
  BOTTOM w0.127: Q14.6 74.44,25.03 75.48,24 78,24 79,23 79,22 77.31,20.31 R39.1
N02742: length 10.6
  VCC w0.127: 82.32,74.04 J6.3 ; J6.3 83.65,75.37 ; J6.3 83.65,72.71 ; J6.3 84.98,74.04 ; J6.4 80.78,74.04 ; J6.4 79.45,75.37 ; J6.4 78.12,74.04 ; J6.4 79.45,72.71
  vias: v1(79.25,76.19)
N02871: length 70.2
  TOP w0.127: v1(67.66,46.61) 61.8,46.61 55.71,52.7 20.15,52.7 15.7,57.14 15.7,69.98 15.7,69.98 J5.11
N02889: length 52.5
  TOP w0.127: v1(46.66,46.61) 40.2,46.61 35.39,51.42 17.61,51.42 13.17,55.87 13.17,69.98 13.16,69.98 J5.9
N02913: length 34.7
  TOP w0.127: J5.7 10.62,69.98 10.62,69.98 10.62,54.6 18.61,46.61 v1(25.66,46.61)
N02946: length 25.8
  TOP w0.127: J5.5 8.08,50.03 v1(4.66,46.61)
N02974: length 28.8
  TOP w0.127: J5.6 9.36,72.27 9.36,53.97 12.51,50.81 IC10.4
N03044: length 107.8
  TOP w0.127: v1(28.56,76.19) 30.27,76.19 IC30.2 ; v1(69.16,46.61) IC39.6
  BOTTOM w0.127: v1(69.16,46.61) 70,47.45 70,51 69,52 23,52 17,58 17,64 19,66 29.08,66 30.13,67.05 30.13,74.62 v1(28.56,76.19) 27.29,77.46 22.5,77.46
N03056: length 103.5
  TOP w0.127: IC31.2 43.65,62.86 43.65,64.76 42.38,66.03 33.21,66.03 29.67,69.56 29.67,73.01 29.03,73.65 v1(28.56,73.65) ; v1(48.16,46.61) IC20.6
  BOTTOM w0.127: 22.5,74.28 22.95,74.73 27.58,74.73 28.48,73.83 R22.2 ; v1(48.16,46.61) 49,47.45 49,51 48.25,51.75 22.89,51.75 16.75,57.89 16.75,64.11 18.89,66.25 28.97,66.25 29.87,67.15 29.87,72.34 v1(28.56,73.65)
N03071: length 67.8
  TOP w0.127: v1(27.16,46.61) IC15.6 ; v1(28.56,71.11) 28.56,70.32 32.85,66.03 32.85,62.86 IC32.2
  BOTTOM w0.127: R21.2 28.48,71.28 27.62,72.15 24.15,72.15 23.11,71.11 22.5,71.11 ; v1(28.56,71.11) 29.62,70.05 29.62,67.26 28.87,66.51 18.79,66.51 16.49,64.21 16.49,57.79 22.79,51.49 27.51,51.49 28,51 28,47.45 v1(27.16,46.61)
N03083: length 67.9
  TOP w0.127: IC33.2 22.06,62.86 22.06,66.66 25.23,69.84 26.81,69.84 28.09,68.57 v1(28.56,68.57) ; v1(6.16,46.61) IC10.6
  BOTTOM w0.127: 22.5,67.94 24.57,70 27.13,70 v1(28.56,68.57) 29,68.13 29,67 28.76,66.76 11.76,66.76 7,62 7,47.45 v1(6.16,46.61)
N03095: length 107.9
  TOP w0.127: IC30.7 41.18,74.02 41.18,75 44.91,78.73 53.17,78.73 55.96,75.94 55.96,55.98 56.58,55.36 80.79,55.36 81.56,54.6 v1(83.02,54.6)
  BOTTOM w0.127: v1(83.02,54.6) 83.02,54.1 83.24,53.88 83.24,28.32 81.92,27 80,27 ; v1(70.75,28.45) 72.21,27 80,27 ; 80,27 79.66,27.34 v1(79.66,27.93)
N03107: length 99.6
  TOP w0.127: IC31.7 55.71,58.41 55.71,55.87 56.47,55.11 80.69,55.11 81.96,53.84 82.12,53.84 83.45,53.84 v1(84.22,54.6)
  BOTTOM w0.127: 58.67,26.74 51.46,26.74 v1(49.75,28.45) ; 58.67,26.74 58.66,26.76 v1(58.66,27.93) ; 58.67,26.74 82.02,26.74 83.49,28.21 83.49,53.88 v1(84.22,54.6)
N03119: length 137.7
  TOP w0.127: IC32.7 40.47,60.31 40.47,55.87 41.48,54.85 80.58,54.85 81.85,53.58 84.4,53.58 v1(85.42,54.6)
  BOTTOM w0.127: 37.68,26.49 37.66,26.51 v1(37.66,27.93) ; 37.68,26.49 30.72,26.49 v1(28.75,28.45) ; 37.68,26.49 82.13,26.49 83.75,28.11 83.75,52.93 v1(85.42,54.6)
N03131: length 172.4
  TOP w0.127: IC33.7 29.67,60.31 29.67,55.25 30.32,54.6 80.47,54.6 81.75,53.33 81.96,53.33 85.34,53.33 v1(86.61,54.6)
  BOTTOM w0.127: v1(7.75,28.45) 9.97,26.24 16.68,26.24 ; 16.68,26.24 30.4,26.24 81.81,26.24 82.02,26.24 82.23,26.23 84,28 84,51.98 v1(86.61,54.6) ; 16.68,26.24 16.66,26.26 v1(16.66,27.93)
N03320: length 3.4
  TOP w0.127: IC37.3 74.12,42.39 74.01,42.5 IC39.1
N03332: length 8.2
  TOP w0.127: IC37.2 v1(75.4,41.27)
  BOTTOM w0.127: IC36.1 70.97,43 74.17,43 75.4,41.77 v1(75.4,41.27)
N03351: length 40.2
  TOP w0.127: v1(63.06,10.58) v1(63.06,14.58) 63.55,14.58 63.57,14.59 68.41,14.59 70.95,12.06 72.86,12.06 74.12,13.33 74.12,14.33 J1.2 72.46,27.26 71.84,27.89 IC38.7
  BOTTOM w0.127: 63.02,14.59 D2.1 ; R38.1 73.89,21.31 73.81,21.23 R39.2 73.81,20.09 73,19.27 73,18 72.46,17.46 J1.2
N03369: length 46.7
  TOP w0.127: J1.4 70.95,14.97 70.95,27.3 71.34,27.68 IC38.6
  BOTTOM w0.127: 68.46,13.46 J1.4 71,14.92 71,20 70.69,20.31 R8.2 69.36,21.23 69.28,21.31 R7.1 ; 68.46,13.46 63.13,13.46 62.5,14.09 D2.2 ; 68.46,13.46 64,9 63.59,9 62.5,10.09 IC25.2
N03381: length 40.8
  TOP w0.127: J2.2 51.46,27.26 50.84,27.89 IC19.7
  BOTTOM w0.127: 61.5,14.09 D2.4 ; 61.5,14.09 60.41,13 54.46,13 J2.2 51.46,17.46 52,18 52,19.27 52.81,20.09 R6.2 52.81,21.23 52.9,21.31 R5.1 ; 61.5,14.09 61.5,12.11 61.3,11.91 59.43,11.91 59.31,11.78 59.31,10.22 59.43,10.09 61.2,10.09 61.5,10.39 IC25.4
N03410: length 42.4
  TOP w0.127: IC19.6 50.34,27.68 49.95,27.3 49.95,14.97 J2.4 52.58,14.58 v1(60.94,14.58) 60,13.64 v1(60,11)
  BOTTOM w0.127: v1(60,11) 60.42,10.58 IC25.5 ; R3.1 48.27,21.31 48.36,21.23 R4.2 49.69,20.31 50,20 50,14.92 J2.4
N03422: length 40.2
  TOP w0.127: IC14.7 29.84,27.89 30.46,27.26 J3.2 32.12,14.33 32.12,13.33 30.85,12.06 28.95,12.06 26.41,14.59 21.57,14.59 21.55,14.58 v1(21.06,14.58) v1(21.06,10.58)
  BOTTOM w0.127: J3.2 30.46,17.46 31,18 31,19.27 31.81,20.09 R2.2 31.81,21.23 31.9,21.31 R1.1 ; 21.02,14.59 D1.1
N03434: length 46.7
  TOP w0.127: J3.4 28.95,14.97 28.95,27.3 29.34,27.68 IC14.6
  BOTTOM w0.127: R13.1 27.27,21.31 27.36,21.23 R14.2 28.69,20.31 29,20 29,14.92 J3.4 26.46,13.46 ; 26.46,13.46 22,9 21.59,9 20.5,10.09 IC2.2 ; 26.46,13.46 21.13,13.46 20.5,14.09 D1.2
N03446: length 40.9
  TOP w0.127: J4.2 9.46,27.26 8.83,27.89 IC9.7
  BOTTOM w0.127: D1.4 19.5,14.09 ; 19.5,14.09 19.5,12.11 19.3,11.91 17.41,11.91 17.28,11.78 17.28,10.22 17.41,10.09 19.2,10.09 19.32,10.2 19.32,10.4 IC2.4 ; 19.5,14.09 18.41,13 12.46,13 J4.2 9.46,17.46 10,18 10,19.27 10.81,20.09 R12.2 10.81,21.23 10.89,21.31 R11.1
N03458: length 42.4
  TOP w0.127: IC9.6 8.33,27.68 7.95,27.3 7.95,14.97 J4.4 10.58,14.58 v1(18.94,14.58) 18,13.64 v1(18,11)
  BOTTOM w0.127: v1(18,11) 18.42,10.58 IC2.5 ; R9.1 6.28,21.31 6.36,21.23 R10.2 7.69,20.31 8,20 8,14.92 J4.4
N03470: length 100
  BOTTOM w0.127: Q14.1 74.44,28.86 75.14,29.55 75.14,31.9 75.39,32.16 75.39,32.4 ; 75.39,32.4 75.39,32.77 75.17,33 68,33 67.78,32.77 67.78,31.54 68,31.31 68,29.13 67.87,29 67,29 66.83,28.83 Q6.1 ; 75.39,32.4 75.77,32.77 75.77,32.77 76.24,33.24 80.26,33.24 ; 80.26,33.24 81.67,33.24 82.98,34.55 82.98,49.1 75.32,56.76 57.27,56.76 56,58.03 56,74 54.19,75.81 v1(53.6,75.81) 51.95,77.46 C35.2 ; 80.26,33.24 79.66,32.64 v1(79.66,31.74)
N03492: length 118
  BOTTOM w0.127: 59.59,33.49 81.56,33.49 82.73,34.66 82.73,48.99 75.21,56.51 57.38,56.51 57.38,56.51 57.17,56.51 55.75,57.93 55.75,71.12 53.95,72.92 53.95,72.92 v1(53.6,73.27) 52.59,74.28 C37.2 ; 59.59,33.49 58.66,32.57 v1(58.66,31.74) ; 59.59,33.49 54.49,33.49 54.4,33.4 54.4,32.77 ; Q5.1 53.45,28.86 54.14,29.55 54.14,31.9 54.4,32.16 54.4,32.77 ; 54.4,32.77 54.17,33 47,33 46.77,32.77 46.77,31.54 47,31.31 47,29.13 46.87,29 46,29 45.83,28.83 Q4.1
N03514: length 136.2
  BOTTOM w0.127: 33.4,32.77 34.37,33.75 38.91,33.75 ; 33.4,32.77 33.17,33 26,33 25.78,32.77 25.78,31.54 26,31.31 26,29.13 25.87,29 25,29 24.83,28.83 Q9.1 ; 33.4,32.77 33.4,32.16 33.14,31.9 33.14,29.55 32.45,28.86 Q1.1 ; 38.91,33.75 81.45,33.75 82.48,34.77 82.48,48.88 75.11,56.25 57.48,56.25 57.48,56.25 57.06,56.25 55.49,57.82 55.49,68.84 v1(53.6,70.73) 52.77,71.56 48.35,71.56 C36.2 ; 38.91,33.75 37.66,32.5 v1(37.66,31.74)
N03538: length 154.7
  BOTTOM w0.127: 18,34 13.62,34 12.39,32.77 ; 18,34 16.66,32.66 v1(16.66,31.74) ; 18,34 81.35,34 82.22,34.87 82.22,48.78 75,56 57.59,56 56.95,56 55.24,57.72 55.24,66.55 v1(53.6,68.19) 52.79,69 48.97,69 C38.2 ; 12.39,32.77 12.39,32.16 12.14,31.9 12.14,29.55 11.44,28.86 Q8.1 ; 12.39,32.77 12.17,33 5,33 4.78,32.77 4.78,31.54 5,31.31 5,29.13 4.87,29 4,29 3.83,28.83 Q7.1
N03748: length 198
  TOP w0.127: LED3.2 64.14,63.11 66.3,60.95 ; v1(58.47,70.15) 58.47,63.27 60.79,60.95 66.3,60.95 ; 86.32,6.84 86.52,6.84 v1(87.45,7.78) ; 86.32,6.84 85.85,6.84 v1(84.92,7.78) v1(84.92,16.49) 85.49,16.49 85.99,16.99 86.4,16.99 86.9,16.49 v1(87.47,16.49) ; 86.32,6.84 81.43,1.95 v1(62.64,1.95) 61.54,1.95 61.54,1.75 61.25,1.45 60.84,1.45 60.54,1.75 60.54,1.95 v1(20.96,1.95) ; 66.3,60.95 v1(66.5,60.95)
  BOTTOM w0.127: IC26.2 84.92,17.91 88,21 88,55.28 ; 88,55.28 86.14,57.14 85.72,57.14 ; 88,55.28 88,58 86.31,59.69 ; 86.31,59.69 85.72,59.69 ; 86.31,59.69 87,60.37 87,61.87 85.87,63 80,63 76.25,59.25 60.11,59.25 57.25,62.11 57.25,69.26 58.14,70.15 v1(58.47,70.15) ; Q11.1 v1(62.64,1.95)
  vias: v1(63.97,66.11)
N04132: length 2.3
  BOTTOM w0.127: Q6.3 68.72,28.73 68.42,29.03 IC6.4
N04160: length 3.9
  BOTTOM w0.127: R7.2 66.28,23.12 67.74,24.59 68.28,24.59 68.72,25.03 Q6.4
N04180: length 7.6
  BOTTOM w0.127: R8.1 66.69,20.31 65,22 65,24 66,25 66,25.03 66.38,25.41 Q6.6
N04349: length 2.3
  BOTTOM w0.127: 26.73,27.91 26.73,28.73 26.42,29.03 26.42,30.05
N04377: length 3.9
  BOTTOM w0.127: R13.2 24.28,23.12 25.74,24.59 26.28,24.59 26.73,25.03 26.73,25.41
N04397: length 7.6
  BOTTOM w0.127: Q9.6 24.38,25.41 24,25.03 24,25 23,24 23,22 24.69,20.31 R14.1
N04832: length 6.3
  BOTTOM w0.127: v1(67.78,74.92) R18.2 R19.2
N05449: length 42.2
  BOTTOM w0.127: Q12.1 57.65,73.96 57,73.31 57,62 60,59 60.21,59 77,59 78.86,57.14 80.31,57.14 IC28.6 IC28.8
N05863: length 30.3
  BOTTOM w0.127: Q10.1 62.96,5.62 64.59,4 78,4 81,7 81,10 82.25,11.25 IC26.7 IC26.6 87.45,11.25
N05866: length 2.3
  TOP w0.127: LED1.1 R15.2
N05972: length 2.5
  TOP w0.127: R17.2 59.85,68.55 60.5,69.2 LED2.1
N06487: length 7.4
  TOP w0.127: v1(20,8.05) v1(20,12.69)
  BOTTOM w0.127: D1.8 D1.3 v1(20,12.69)
N06507: length 9.6
  BOTTOM w0.127: Q3.3 18.95,4.05 18,5 18,8.09 20,10.09 IC2.3 IC2.8
N06731: length 68.5
  BOTTOM w0.127: Q2.1 20.96,5.04 23,3 82.47,3 83.11,2.36 IC3.7 IC3.6 87.45,2.36
N07958:
  vias: v1(61.25,66.03)
N09508: length 1.8
  TOP w0.127: LED8.1 R34.2
N09512: length 1.8
  TOP w0.127: LED9.1 R35.2
N09516: length 1.8
  TOP w0.127: LED10.1 R36.2
N09520: length 1.8
  TOP w0.127: LED11.1 R37.2
N10946: length 1.8
  TOP w0.127: LED4.1 R26.2
N10950: length 1.8
  TOP w0.127: LED5.1 R27.2
N10954: length 1.8
  TOP w0.127: LED6.1 R28.2
N10958: length 1.8
  TOP w0.127: LED7.1 R29.2
N12525: length 81.8
  TOP w0.127: IC39.4 75.51,50.67 72.86,53.33 21.42,53.33 16.97,57.77 16.97,72.27 J5.12
N12551: length 64.5
  TOP w0.127: J5.10 14.44,72.27 14.44,56.5 18.88,52.06 53.8,52.06 54.51,51.36 IC20.4
N12586: length 46.1
  TOP w0.127: IC15.4 33.51,50.13 32.85,50.79 16.34,50.79 11.89,55.23 11.89,72.27 J5.8
N045052: length 3.3
  BOTTOM w0.127: Q12.3 R18.1
N045232: length 3.3
  BOTTOM w0.127: Q13.3 R19.1

## Copper pours and planes (outline as drawn; the poured copper is in the pictures)
3V3_FPGA on VCC: 1.78,39.46 1.2,40.04 1.2,78.05 2.14,79 33.71,79 34.66,78.05 34.66,67.26 35.35,66.56 46.14,66.56 46.72,65.99 46.72,55.91 46.14,55.34 43.69,55.34 43.11,55.91 43.11,64.8 42.42,65.5 35.98,65.5 35.29,64.8 35.29,55.91 34.71,55.34 32.89,55.34 32.31,55.91 32.31,64.8 31.62,65.5 25.19,65.5 24.5,64.8 24.5,54.56 25.19,53.86 75.35,53.86 80.38,48.84 80.38,40.04 79.8,39.46
12V0 on VCC: 82.78,1 81.84,1.94 81.84,17.73 87.56,23.44 87.56,55.28 86.87,55.97 77.34,55.97 75.44,57.88 73.53,57.88 72.32,59.09 72.32,62.18 74.22,64.08 74.22,71.79 73.53,72.48 71.63,72.48 70.41,73.69 70.41,77.42 71.99,79 77.53,79 78.47,78.05 78.47,75.6 77.2,74.33 77.2,72.97 77.89,72.28 88.05,72.28 89,71.34 89,2.3 87.7,1
GND_FPGA on GND: 1.78,39.46 1.2,40.04 1.2,78.05 2.14,79 33.71,79 34.66,78.05 34.66,67.26 35.35,66.56 46.14,66.56 46.72,65.99 46.72,55.91 46.14,55.34 43.69,55.34 43.11,55.91 43.11,64.8 42.42,65.5 35.98,65.5 35.29,64.8 35.29,55.91 34.71,55.34 32.89,55.34 32.31,55.91 32.31,64.8 31.62,65.5 25.19,65.5 24.5,64.8 24.5,54.56 25.19,53.86 75.35,53.86 80.38,48.84 80.38,40.04 79.8,39.46
GND_PWR on GND: 82.78,1 82.42,1.36 1.78,1.36 1.2,1.94 1.2,38.68 1.78,39.26 80.52,39.26 81.21,39.95 81.21,48.93 76.07,54.06 30.35,54.06 29.14,55.28 29.14,64.08 30.35,65.3 31.54,65.3 32.12,64.72 32.12,55.83 32.81,55.14 39.24,55.14 39.94,55.83 39.94,64.08 41.15,65.3 42.33,65.3 42.91,64.72 42.91,55.83 43.6,55.14 50.67,55.14 51.37,55.83 51.37,66.07 50.67,66.77 39.88,66.77 39.3,67.34 39.3,78.05 40.24,79 87.69,79 89,77.69 89,2.3 87.7,1
VCC_PWR on VCC: 1.78,1.36 1.2,1.94 1.2,38.68 1.78,39.26 80.52,39.26 81.21,39.95 81.21,48.93 76.07,54.06 30.35,54.06 29.14,55.28 29.14,64.08 30.35,65.3 31.54,65.3 32.12,64.72 32.12,55.83 32.81,55.14 39.24,55.14 39.94,55.83 39.94,64.08 41.15,65.3 42.33,65.3 42.91,64.72 42.91,55.83 43.6,55.14 50.67,55.14 51.37,55.83 51.37,66.07 50.67,66.77 39.88,66.77 39.3,67.34 39.3,78.05 40.24,79 71.71,79 70.22,77.5 70.22,73.61 71.54,72.28 73.45,72.28 74.03,71.7 74.03,64.17 72.12,62.26 72.12,59 73.45,57.67 75.35,57.67 77.26,55.77 86.78,55.77 87.36,55.19 87.36,23.53 81.64,17.81 81.64,1.94 81.07,1.36
N02742 on VCC: 77.98,72.48 77.4,73.06 77.4,74.24 78.67,75.51 78.67,78.05 79.61,79 87.69,79 89,77.69 89,73.42 88.05,72.48

Small or netless copper shapes (teardrops, artwork), in the pictures only: 2 on GND, 3 on VCC
